# Allegro board demoa2.brd
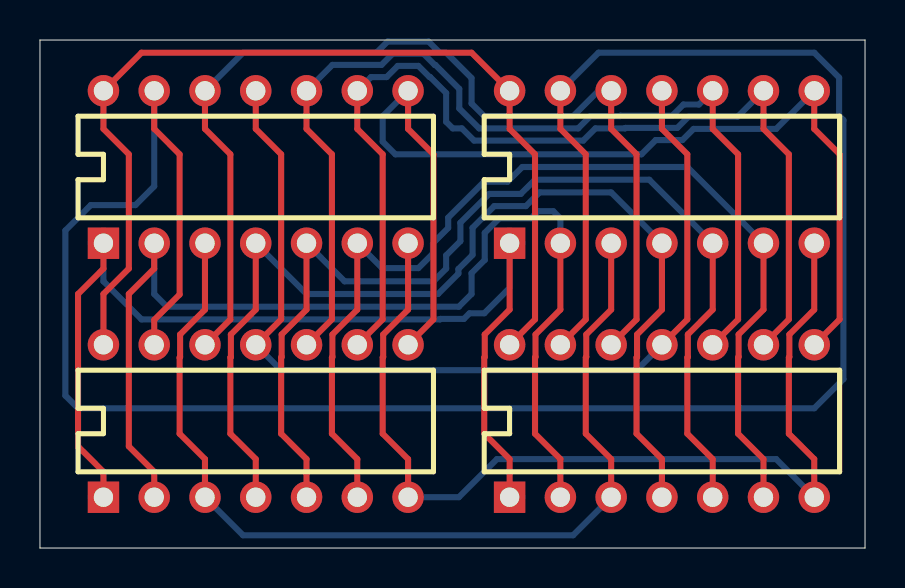
[diagram p0: board, top side]
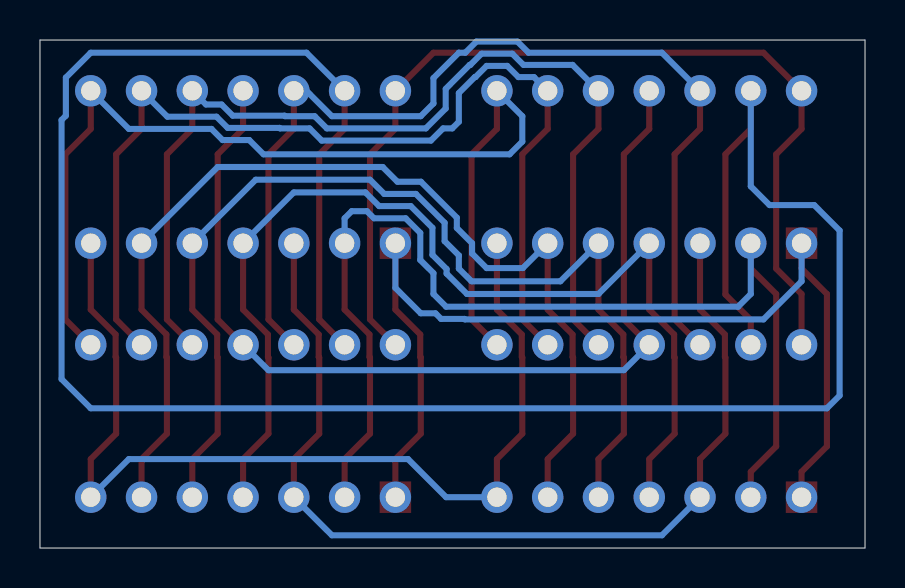
[diagram p1: board, bottom side, seen from below]

Outline 41.27 x 25.4 mm; copper layers: TOP, GND, POWER, INNER1, INNER2, BOTTOM. Coordinates in mm from the lower left corner of the outline.
Outline path: 0,25.4 0,0 41.27,0 41.27,25.4 0,25.4

## Design rules (mm)
nets with their own width: min track width 0.305; nets DAT1 DAT2 DAT3 DAT4 DAT5 DAT6 DAT7 DAT8 DAT9 DAT10 DAT11 DAT12 GND VCC

## Placement (name value [footprint] x y rotation side)
U1  7400  [DIP14]  3.17 15.24 0 top
U2  7400  [DIP14]  23.5 15.24 0 top
U3  7400  [DIP14]  3.17 2.54 0 top
U4  7400  [DIP14]  23.5 2.54 0 top

## Library data of the parts
U1-U4 = 7400

## Footprints (pads in the part's own frame, mm; a bottom-side part is the same pattern mirrored in y, then rotated)
DIP14
  rect 1.575x1.575 hole 0.965: 1(0,0)
  round 1.575 hole 0.965: 2(2.54,0) 3(5.08,0) 4(7.62,0) 5(10.16,0) 6(12.7,0) 7(15.24,0) 8(15.24,7.62) 9(12.7,7.62) 10(10.16,7.62) 11(7.62,7.62) 12(5.08,7.62) 13(2.54,7.62) 14(0,7.62)

## Nets
GND: U1.7(TP-7) U2.7(TP-7) U3.7(TP-7) U4.7(TP-7)
VCC: U1.14(TP-14) U2.14(TP-14) U3.14(TP-14) U4.14(TP-14)
DAT1: U1.2(TP-2) U2.2(TP-2) U3.2(TP-2) U4.2(TP-2)
DAT2: U1.1(TP-1) U2.1(TP-1) U3.1(TP-1) U4.1(TP-1)
DAT3: U1.3(TP-3) U2.3(TP-3) U3.3(TP-3) U4.3(TP-3)
DAT4: U1.5(TP-5) U2.5(TP-5) U3.5(TP-5) U4.5(TP-5)
DAT5: U1.4(TP-4) U2.4(TP-4) U3.4(TP-4) U4.4(TP-4)
DAT6: U1.6(TP-6) U2.6(TP-6) U3.6(TP-6) U4.6(TP-6)
DAT7: U1.10(TP-10) U2.10(TP-10) U3.10(TP-10) U4.10(TP-10)
DAT8: U1.9(TP-9) U2.9(TP-9) U3.9(TP-9) U4.9(TP-9)
DAT9: U1.8(TP-8) U2.8(TP-8) U3.8(TP-8) U4.8(TP-8)
DAT10: U1.13(TP-13) U2.13(TP-13) U3.13(TP-13) U4.13(TP-13)
DAT11: U1.12(TP-12) U2.12(TP-12) U3.12(TP-12) U4.12(TP-12)
DAT12: U1.11(TP-11) U2.11(TP-11) U3.11(TP-11) U4.11(TP-11)

## Routing (per net, layer and track width the routed paths; a pad name or vN(x,y) marks a point on that pad's centre or on a via; arc(x,y) is an arc through that point)
GND: length 49.4
  TOP w0.305: U4.7 38.73,4.45 37.46,5.71 37.46,9.53 37.49,9.55 37.49,10.68 38.73,11.92 U2.7 ; U1.7 18.42,11.92 17.17,10.68 17.17,9.55 17.15,9.53 17.15,5.71 18.42,4.45 U3.7
  BOTTOM w0.305: U3.7 20.96,2.54 22.86,4.45 36.83,4.45 U4.7
VCC: length 49.4
  TOP w0.305: U4.14 24.77,11.43 24.77,19.68 23.5,20.95 U2.14 21.59,24.77 5.08,24.77 U1.14 3.17,20.95 4.45,19.68 4.45,13.97 3.17,12.7 U3.14
DAT1: length 55.4
  TOP w0.305: U3.2 5.71,3.81 4.45,5.08 4.45,12.7 5.71,13.97 U1.2 ; U2.2 26.04,11.92 24.79,10.68 24.79,9.55 24.77,9.53 24.77,5.71 26.04,4.45 U4.2
  BOTTOM w0.305: U1.2 5.71,12.7 6.35,12.06 20.96,12.06 21.59,12.7 21.59,13.74 22.25,14.4 22.25,15.76 22.98,16.48 24.56,16.48 24.92,16.84 25.68,16.84 26.04,16.48 U2.2
DAT2: length 53.4
  TOP w0.305: U3.1 3.17,3.81 1.91,5.08 1.91,12.7 3.17,13.97 U1.1 ; U4.1 23.5,4.45 22.23,5.71 22.23,9.53 22.25,9.55 22.25,10.68 23.5,11.92 U2.1
  BOTTOM w0.305: U2.1 23.5,13 22.23,11.73 21.49,11.73 21.21,11.46 20.04,11.46 20.02,11.43 5.08,11.43 3.17,13.34 U1.1
DAT3: length 49.4
  TOP w0.305: U4.3 28.58,4.45 27.31,5.71 27.31,9.53 27.33,9.55 27.33,10.68 28.58,11.92 U2.3 ; U1.3 8.26,11.92 7.01,10.68 7.01,9.55 6.98,9.53 6.98,5.71 8.26,4.45 U3.3
  BOTTOM w0.305: U4.3 26.67,0.64 10.16,0.64 U3.3
DAT4: length 53
  TOP w0.305: U3.5 13.33,4.45 12.06,5.71 12.06,9.53 12.09,9.55 12.09,10.68 13.33,11.92 U1.5 ; U2.5 33.66,11.92 32.41,10.68 32.41,9.55 32.38,9.53 32.38,5.71 33.66,4.45 U4.5
  BOTTOM w0.305: U1.5 15.24,13.34 19.69,13.34 20.32,13.97 20.32,14.63 21.03,15.34 21.03,16.26 22.47,17.7 24.05,17.7 24.77,18.41 30.48,18.41 U2.5
DAT5: length 53
  TOP w0.305: U3.4 10.79,4.45 9.53,5.71 9.53,9.53 9.55,9.55 9.55,10.68 10.79,11.92 U1.4 ; U4.4 31.12,4.45 29.85,5.71 29.85,9.53 29.87,9.55 29.87,10.68 31.12,11.92 U2.4
  BOTTOM w0.305: U1.4 13.33,12.7 19.91,12.7 20.93,13.72 20.93,13.95 21.64,14.66 21.64,16.01 22.73,17.09 24.31,17.09 24.99,17.78 28.58,17.78 U2.4
DAT6: length 52.6
  TOP w0.305: U2.6 36.2,11.92 34.95,10.68 34.95,9.55 34.92,9.53 34.92,5.71 36.2,4.45 U4.6 ; U3.6 15.88,4.45 14.61,5.71 14.61,9.53 14.63,9.55 14.63,10.68 15.88,11.92 U1.6
  BOTTOM w0.305: U1.6 17.12,14 18.93,14 19.66,14.72 19.66,15.24 20.42,16 20.42,16.52 22.22,18.31 23.39,18.31 24.13,19.05 32.38,19.05 U2.6
DAT7: length 51.5
  TOP w0.305: U2.10 33.66,20.95 34.92,19.68 34.92,11.43 U4.10 ; U3.10 14.61,11.43 14.61,19.68 13.33,20.95 U1.10
  BOTTOM w0.305: U2.10 32.97,22.17 32.19,22.17 31.63,21.62 29.04,21.62 29.01,21.59 27.53,21.59 26.92,20.98 21.97,20.98 20.98,21.97 20.98,22.95 19.78,24.16 19.74,24.16 19.18,24.71 17.65,24.71 17.09,24.16 14.63,24.16 U1.10
DAT8: length 51.8
  TOP w0.305: U2.9 36.2,20.95 37.46,19.68 37.46,11.43 U4.9 ; U1.9 15.88,20.95 17.15,19.68 17.15,11.43 U3.9
  BOTTOM w0.305: U2.9 34.9,21.56 32.44,21.56 31.88,21.01 29.29,21.01 29.27,20.98 27.79,20.98 27.18,20.37 21.72,20.37 21.11,20.98 20.65,20.98 20.32,21.31 20.32,22.75 19.52,23.55 19.49,23.55 18.93,24.1 17.9,24.1 17.34,23.55 16.56,23.55 U1.9
DAT9: length 53.7
  TOP w0.305: U1.8 18.42,20.95 19.69,19.68 19.69,11.43 U3.8 ; U4.8 40,11.43 40,19.68 38.73,20.95 U2.8
  BOTTOM w0.305: U1.8 17.15,21.59 17.15,20.32 17.78,19.68 30.09,19.68 30.8,20.4 32.14,20.4 32.7,20.95 36.83,20.95 U2.8
DAT10: length 116.1
  TOP w0.305: U2.13 26.04,20.95 27.31,19.68 27.31,11.43 U4.13 ; U1.13 5.71,20.95 6.98,19.68 6.98,12.67 5.71,11.4 U3.13
  BOTTOM w0.305: U2.13 27.94,24.77 38.73,24.77 39.98,23.52 39.98,21.62 40.2,21.4 40.2,8.45 38.73,6.99 1.91,6.99 1.27,7.62 1.27,15.88 2.54,17.14 4.78,17.14 5.71,18.08 U1.13
DAT11: length 51.7
  TOP w0.305: U1.12 8.26,20.95 9.53,19.68 9.53,11.43 U3.12 ; U4.12 29.85,11.43 29.85,19.68 28.58,20.95 U2.12
  BOTTOM w0.305: U1.12 10.16,24.77 16.83,24.77 17.39,25.32 19.44,25.32 20,24.77 20.32,24.77 21.59,23.5 21.59,22.23 22.23,21.59 26.67,21.59 27.94,22.86 U2.12
DAT12: length 48.9
  TOP w0.305: U4.11 32.38,11.43 32.38,19.68 31.12,20.95 U2.11 ; U1.11 10.79,20.95 12.06,19.68 12.06,11.43 U3.11
  BOTTOM w0.305: U4.11 29.85,8.89 12.06,8.89 U3.11
